# Altium PCB TSAL_Inverters.PcbDoc (part 1 of 2)
Units mm, origin at the board's own origin, x right, y up, seen from the top; angles counter-clockwise.
Board outline 68 x 46 mm, 2 copper layers (Top Layer, Bottom Layer), stack 1.57 mm thick; 50 components, 20 nets, 115 pads, 25 vias.
Unrouted connection lines stored in the file: 1.
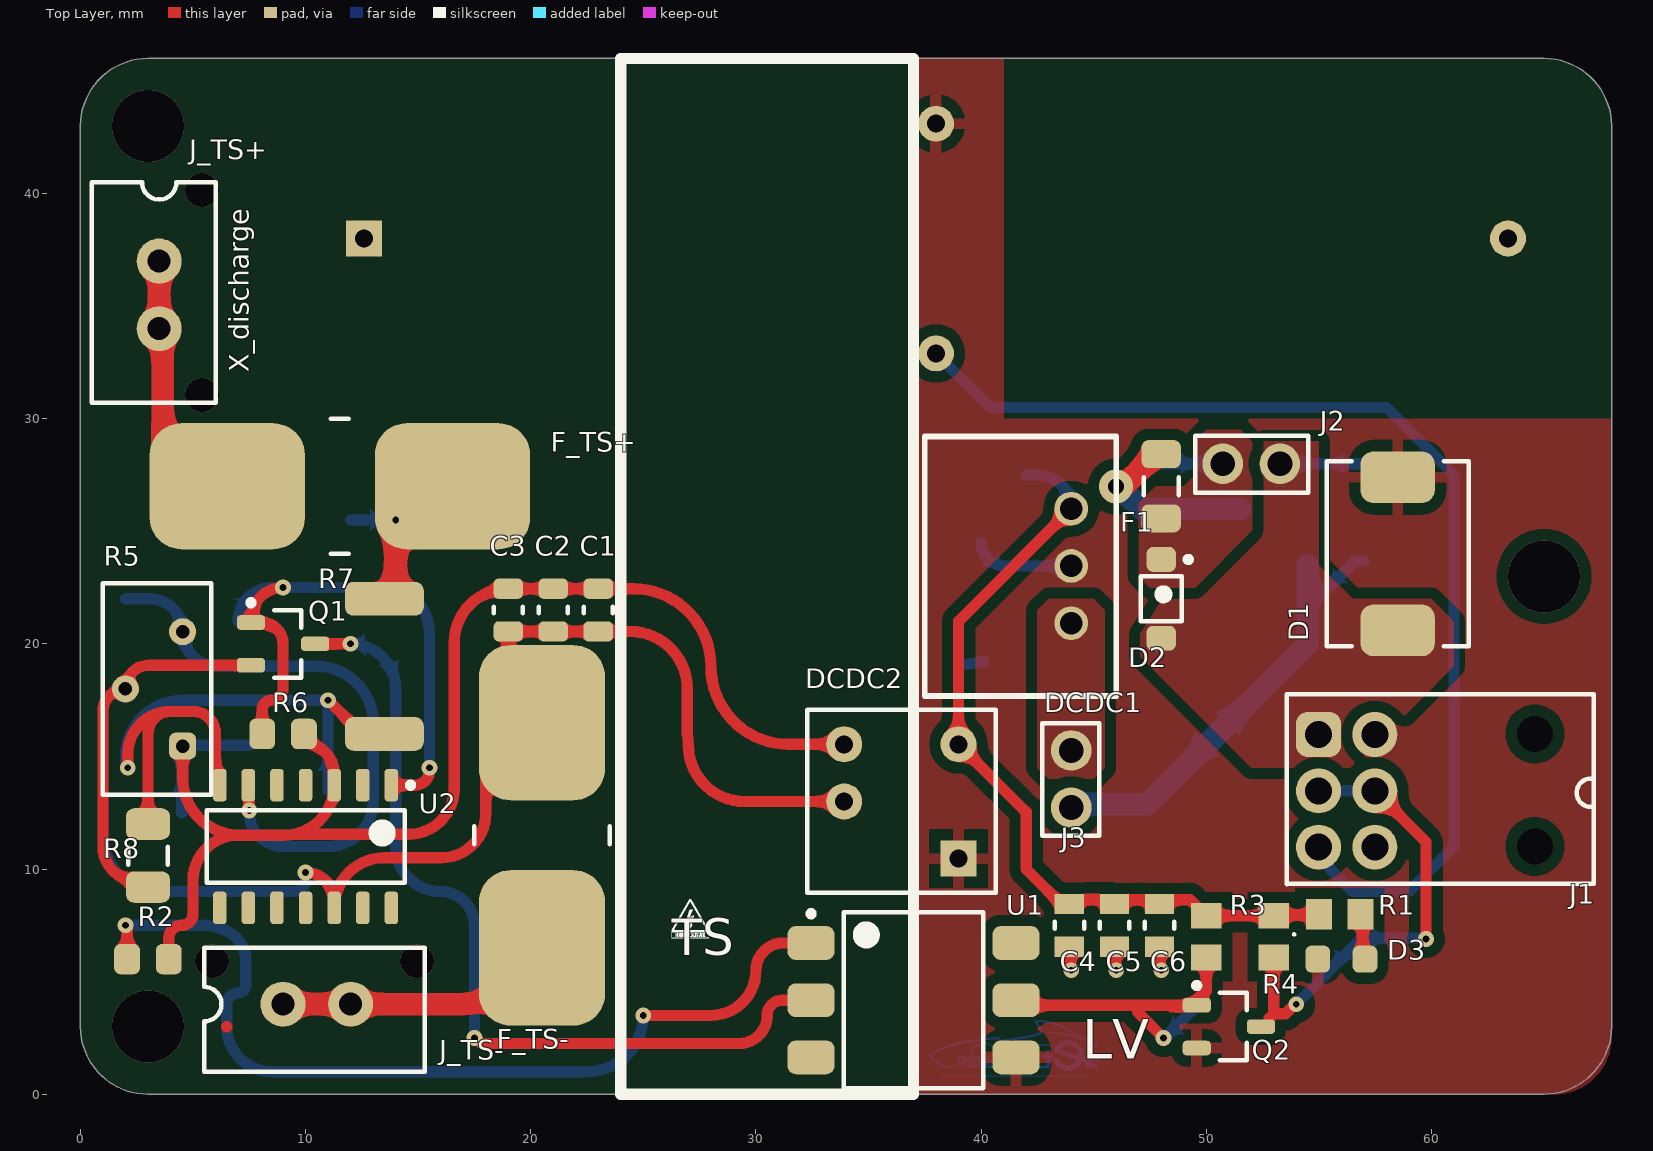
[diagram p0: Top Layer view]
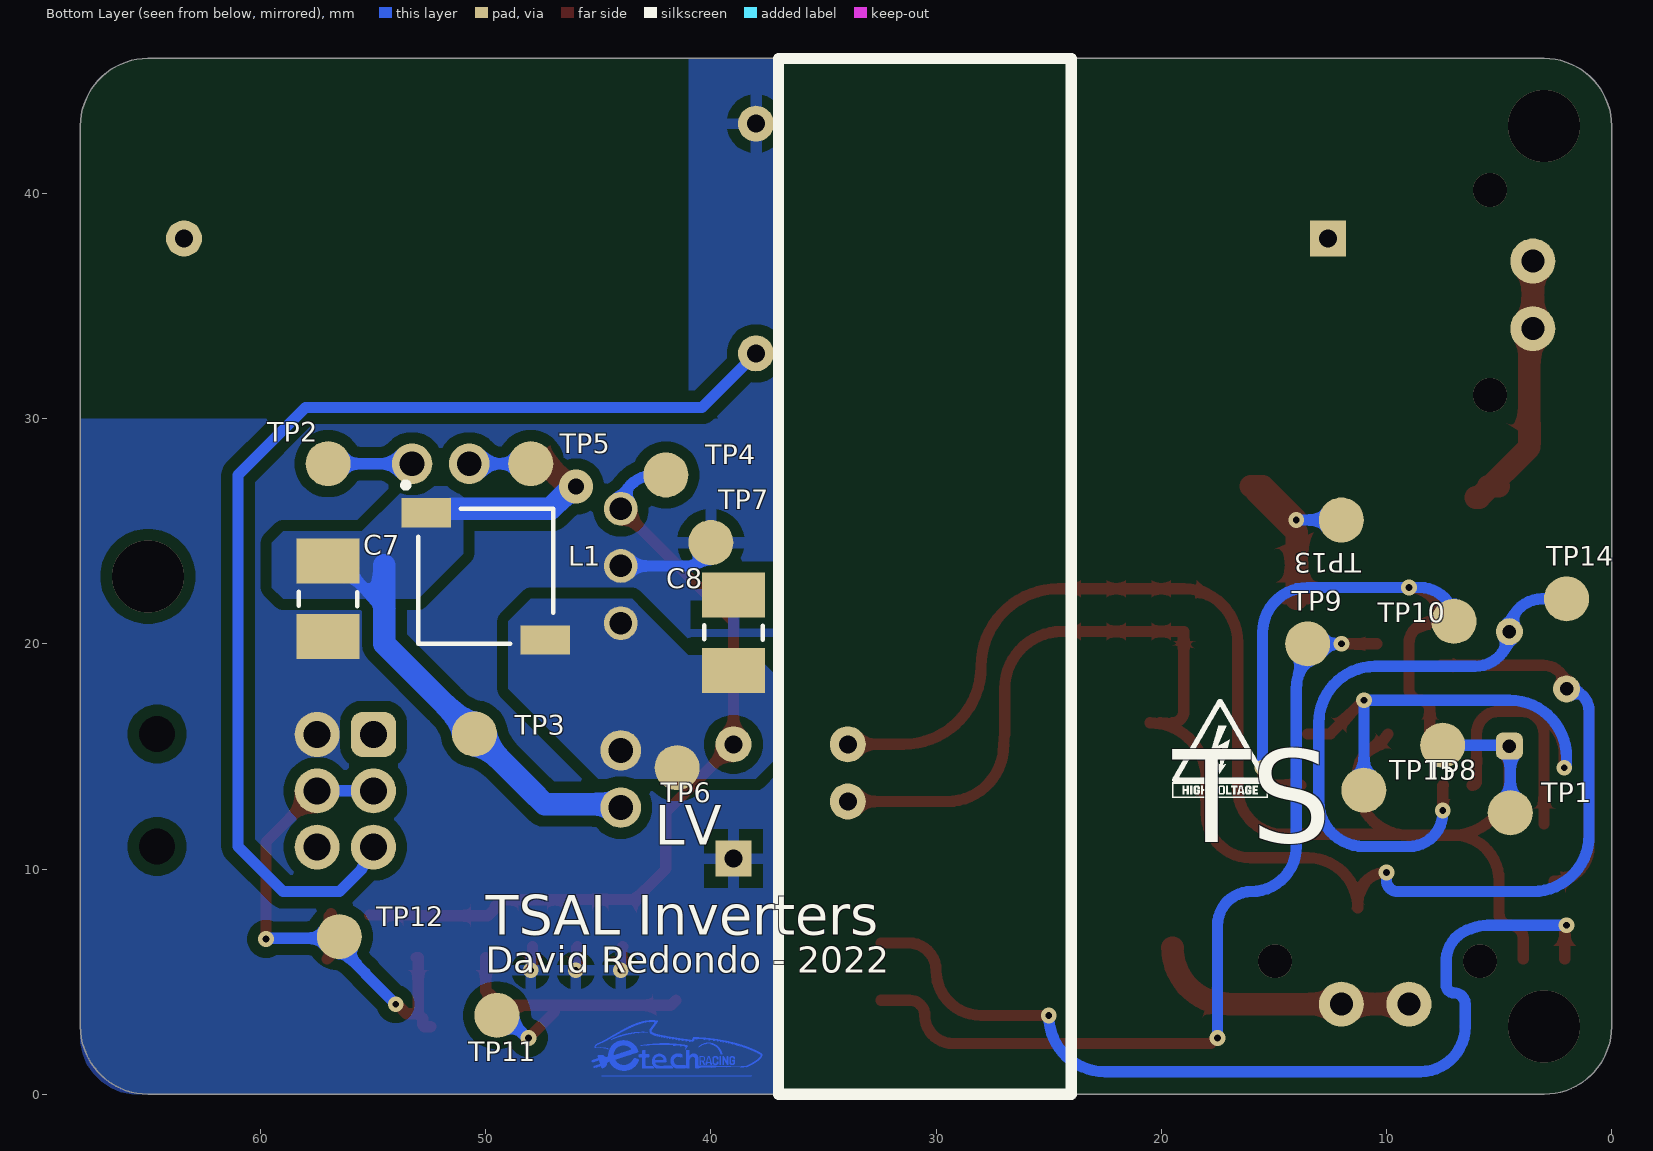
[diagram p1: Bottom Layer view, seen from below]
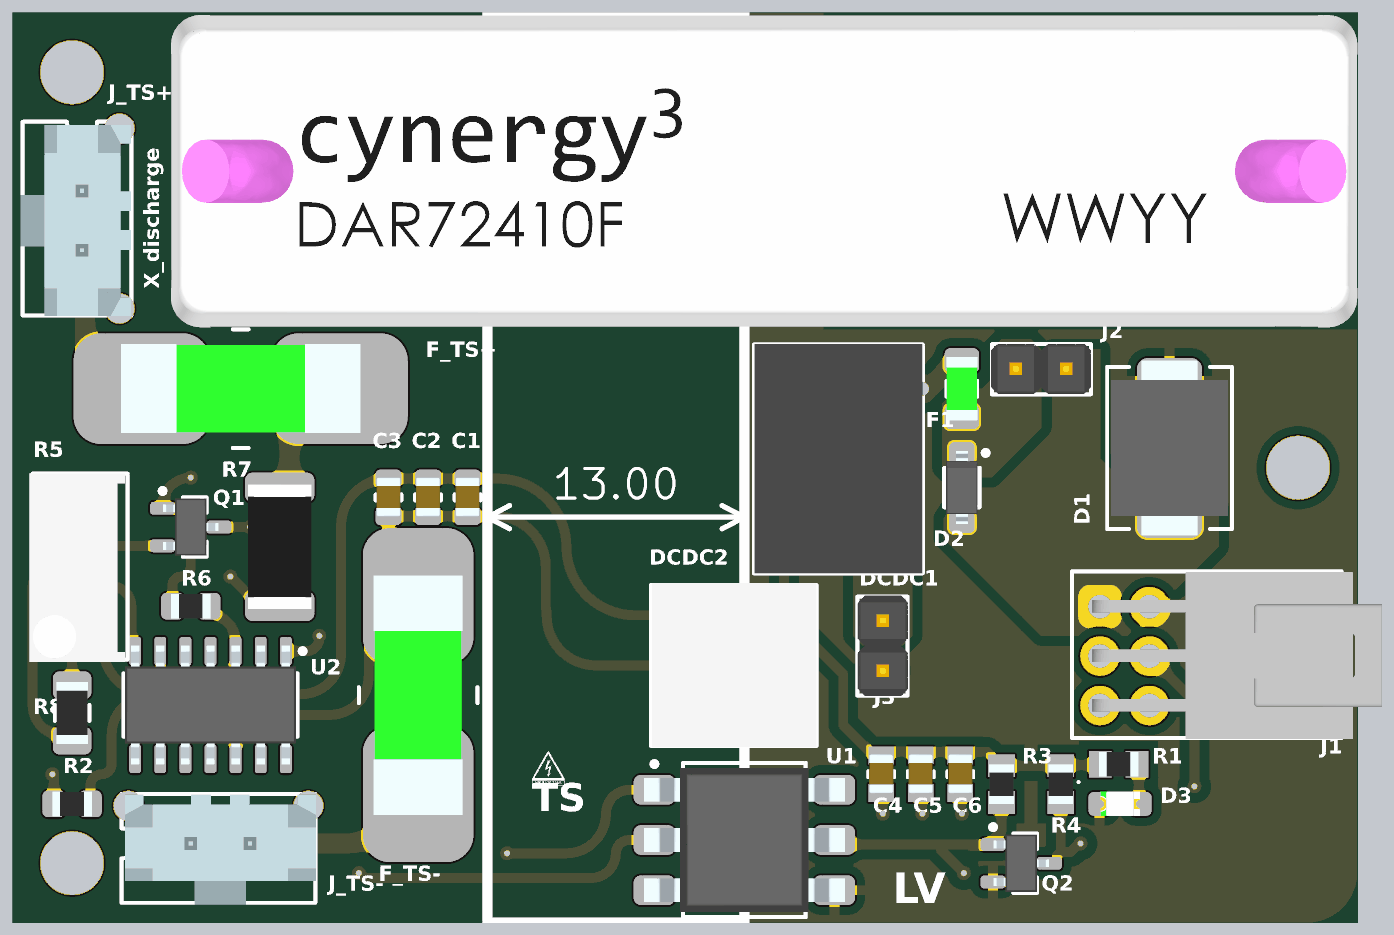
[diagram p2: 3D render of the assembled board from above, using the file's embedded part models]

## Layer stack, top to bottom
Top Solder: solder mask 0.01, Solder Resist, Dk 3.5
Top Layer: signal copper 0.035
Dielectric 1: dielectric 1.5, FR-4, Dk 4.8
Bottom Layer: signal copper 0.035
Bottom Solder: solder mask 0.01, Solder Resist, Dk 3.5

## Board outline
3,0 cw(c3,3) 0,3 0,43 cw(c3,43) 3,46 65,46 cw(c65,43) 68,43 68,3 cw(c65,3) 65,0

## Design rules (kind name [scope] priority, off if disabled: settings)
Clearance [All] p1: gap=0.5 ignorepadtopadclearanceinfootprint=FALSE
Height [All] p1: minheight=0 maxheight=40 prefheight=12.7
HoleSize [All] p1: absolutevalues=TRUE maxlimit=5 minlimit=0.2 maxpercent=80.000 minpercent=20.000
PolygonConnect [All] p1: connectstyle=Relief reliefconductorwidth=0.5 reliefentries=4 polygonreliefangle="90 Angle" airgapwidth=0.5
RoomDefinition TSAL_Inverters [InComponentClass('TSAL_Inverters')] p1: confinementstyle=ConfineIn formatcopy=TRUE lockcomponents=FALSE outline 0,0 73.5,0 73.5,47.5 0,47.5
RoutingVias [All] p1: holewidth=0.3 width=0.7 viastyle="Through Hole" minholewidth=0.2 minwidth=0.5 maxholewidth=3 maxwidth=7
SolderMaskExpansion [All] p1: expansion=0.102 istentingtop=FALSE
Width [All] p1: maxlimit=5 minlimit=0.2 preferedwidth=0.5
28 further rules are at their usual default settings.

## Components (designator, comment, footprint, x,y, rotation, side; value= is the part's Value field where it differs from the comment)
C1 "885012207092" C0805FNPC-R#1 23,21.5 r270 top
C2 "885012207098" C0805FNPC-R#1 21,21.5 r270 top
C3 "885012207103" C0805FNPC-R#1 19,21.5 r270 top
C4 "885012207092" C0805FNPC-R#2 43.92,7.5 r270 top
C5 "885012207098" C0805FNPC-R#2 45.92,7.5 r270 top
C6 "885012207103" C0805FNPC-R#2 47.92,7.5 r270 top
C7 "GRJ32ER71H106KE11L" C10u-50V-1210FNPMLCC-X7R 57,22 r90 bottom
C8 "GRJ32ER71H106KE11L" C10u-50V-1210FNPMLCC-X7R 39,20.5 r270 bottom
D1 "824551301" DTVS-DO-214AB 58.5,24 r270 top
D2 "MBR0530" DSC-SOD123 48,22 r270 top
D3 "150080VS75000" LED_0805_WE 56,6 r0 top
DCDC1 "173951236" DCDC_Magi3c 44,23.46 r270 top
DCDC2 "RNM-1205S/P" DCDC_RNM-XX05S/P 36.46,13 r270 top
F1 "0437001.WRA" Fuse_1206 48,27 r90 top
F_TS+ "485001" Fuse_485001 11.525,27 r180 top
F_TS- "485001" Fuse_485001 20.5,11.5 r270 top
J1 "J_NanoFit_2x3" J_NanoFit_2x3 61,13.5 r90 top
J2 "61300211121" J_Pinheader_1x2 52,28 r180 top
J3 "61300211121" J_Pinheader_1x2 44,14 r90 top
J_TS+ "436500215" J_MicroFit_2x1 3.5,37 r90 top
J_TS- "436500215" J_MicroFit_2x1 9,4 r180 top
L1 "CDC5D23BNP-470KC" L_47u-490mA_CF 50,23 r180 bottom
Q1 "SQ2318BES-T1_GE3" TRT-NCH-3/35-CPH 9,20 r0 top
Q2 "SQ2318BES-T1_GE3" TRT-NCH-3/35-CPH 51,3 r0 top
R1 "CR0805-JW-102ELF" R0805FTK#1 55.925,8 r180 top
R2 "CR0805-JW-102ELF" R0805FTK#2 3,6 r0 top
R3 "CR0805-JW-103ELF" R0805FTK#1 50,7 r90 top
R4 "CR0805-JW-103ELF" R0805FTK#1 53,7 r90 top
R5 "3296W-1-103LF" R10k-VTR 3.27,18 r180 top
R6 "CR0805-JW-103ELF" R0805FTK#2 9,16 r0 top
R7 "R2M-2512FTK" R2512FTK 13.5,19 r90 top
R8 "CRCW120610K0FKEA" R1206FTK-W 3,10.6 r90 top
TP1 "TestPoint" TestPoint 4.5,12.5 r180 bottom
TP2 "TestPoint" TestPoint 57,28 r180 bottom
TP3 "TestPoint" TestPoint 50.5,16 r180 bottom
TP4 "TestPoint" TestPoint 42,27.5 r180 bottom
TP5 "TestPoint" TestPoint 48,28 r180 bottom
TP6 "TestPoint" TestPoint 41.5,14.5 r180 bottom
TP7 "TestPoint" TestPoint 40,24.5 r180 bottom
TP8 "TestPoint" TestPoint 7.5,15.5 r180 bottom
TP9 "TestPoint" TestPoint 13.5,20 r180 bottom
TP10 "TestPoint" TestPoint 7,21 r90 bottom
TP11 "TestPoint" TestPoint 49.5,3.5 r270 bottom
TP12 "TestPoint" TestPoint 56.5,7 r90 bottom
TP13 "TestPoint" TestPoint 12,25.5 r270 bottom
TP14 "TestPoint" TestPoint 2,22 r90 bottom
TP15 "TestPoint" TestPoint 11,13.5 r90 bottom
U1 "4N35" Optocoupler_4N35 37,4.175 r0 top
U2 "LM339D" Array_4_Amp_LM339D 10,11 r270 top
X_discharge "DBR72410FU" Relay_DAR72410FU 38,38 r0 top

## Footprints (in the part's own frame and the unit in brackets; to place one, negate y for a bottom-side part, rotate by r counter-clockwise, add the part's x,y. Pads: shape width x height; smd on the part's side, far side on the other; paste and mask are expansions set on the pad)
Array_4_Amp_LM339D [mm] "SOIC, 14-Leads, Body 8,65x3,90mm, Pitch 1,27mm, IPC Medium Density"
  rrect50% 1.45x0.6 smd: 1(-2.725,3.81) 2(-2.725,2.54) 3(-2.725,1.27) 4(-2.725,0) 5(-2.725,-1.27) 6(-2.725,-2.54) 7(-2.725,-3.81) 8(2.725,-3.81) 9(2.725,-2.54) 10(2.725,-1.27) 11(2.725,0) 12(2.725,1.27) 13(2.725,2.54) 14(2.725,3.81)
  silkscreen extent -2.85,-4.4 1.6,4.79, body extent -3,-4.33 3,4.33, height 1.75
C10u-50V-1210FNPMLCC-X7R [mm]
  rect 2x2.8 smd: 1(-1.675,0) 2(1.675,0)
  silkscreen extent -0.33,-1.3 0.33,1.3, body extent -1.6,-1.25 1.6,1.25, height 2.78
C0805FNPC-R#1 [mm]
  rrect50% 0.9x1.3 smd: 1(-0.95,0) 2(0.95,0)
  silkscreen extent -0.15,-0.65 0.15,0.65, body extent -1.03,-0.63 0.97,0.63, height 0.96
C0805FNPC-R#2 [mm]
  rect 0.9x1.3 smd: 1(-0.95,0) 2(0.95,0)
  silkscreen extent -0.15,-0.65 0.15,0.65, body extent -1.03,-0.63 0.97,0.63, height 0.96
DCDC_Magi3c [mm]
  round 1.5 hole 1: 1(2.54,0) 2(0,0) 3(-2.54,0)
  silkscreen extent -5.75,-6.5 5.77,2, body extent -5.8,-6.5 5.8,2, height 10.2
DCDC_RNM-XX05S/P [mm]
  rect 1.6x1.6 hole 0.8: 1(2.54,2.54)
  round 1.6 hole 0.8: 3(-2.54,2.54) 4(-2.54,-2.54) 5(0,-2.54)
  silkscreen extent -4.06,-4.19 4.06,4.19, body extent -4.18,-4.12 4.12,4.18, height 6.8
DSC-SOD123 [mm] "SOIC, 2-Leads, Body 1,60x2,69mm, Pitch 1,27mm, IPC Low Density"
  rrect50% 1.1x1.3 smd: A(1.75,0) K(-1.75,0)
  silkscreen extent -1.87,-0.9 1,1.33, body extent -1.86,-0.8 1.86,0.8, height 1.36
DTVS-DO-214AB [mm] "Molded Diode, 2-Leads, Body 7,94x5,90mm"
  rrect50% 2.3x3.3 smd: 1(-3.4,0) 2(3.4,0)
  silkscreen extent -4.1,-3.15 4.1,3.15, body extent -4.42,-2.95 4.42,2.95, height 2.9
Fuse_1206 [mm] "Chip Resistor, 2-Leads, Body 3,20x1,58mm, IPC Medium Density"
  rrect50% 1.25x1.75 smd: 1(-1.425,0) 2(1.425,0)
  silkscreen extent -0.4,-0.77 0.4,0.77, body extent -1.6,-0.79 1.6,0.79, height 0.86
Fuse_485001 [mm]
  rrect50% 6.9x5.6 smd: 1(-5,0) 2(5,0)
  silkscreen extent -0.4,-3 0.4,3, body extent -6.05,-2.25 6.05,2.25, height 4.5
J_MicroFit_2x1 [mm]
  round 2 hole 1.02: 1(0,0) 2(-3,0)
  silkscreen extent -6.3,-2.5 3.5,3, body extent -6.32,-2.47 3.32,3.1, height 10
J_NanoFit_2x3 [mm]
  rrect50% 2x2 hole 1.2: 1(2.475,6.015)
  round 2 hole 1.2: 2(-0.025,6.015) 3(-2.525,6.015) 4(2.475,3.515) 5(-0.025,3.515) 6(-2.525,3.515)
  round 1.524 hole 1.6: 7(-2.5,-3.59) 7(2.5,-3.59)
  silkscreen extent -4.18,-6.2 4.26,7.42, body extent -4.22,-8.23 4.22,6.43, height 9.35
J_Pinheader_1x2 [mm]
  round 1.8 hole 1.1: 1(-1.27,0) 2(1.27,0)
  silkscreen extent -2.52,-1.25 2.48,1.29, body extent -2.54,-1.27 2.54,1.27, height 9.5
L_47u-490mA_CF [mm] "Precision Wire Wound Inductor, 2-Leads, Body 5,80x5,80mm, IPC Medium Density"
  rect 2.2x1.3 smd: 1(-2.65,2.825) 2(2.643,-2.832)
  silkscreen extent -3.68,-3 3,4.17, body extent -3,-3 3,3, height 2.5
LED_0805_WE [mm] "SODFL, 2-Leads, Body 1,60x3,20mm, IPC Medium Density"
  rrect50% 1.1x1.2 smd: A(1.05,0) K(-1.05,0)
  silkscreen extent -2.15,1.05 -2.05,1.15, body extent -1,-0.62 1,0.63, height 0.7
Optocoupler_4N35 [mm] "SOP, 6-Leads, Body 7,30x6,50mm, Pitch 2,54mm, IPC Medium Density"
  rrect50% 2.1x1.5 smd: 1(-4.55,2.54) 2(-4.55,0) 3(-4.55,-2.54) 4(4.55,-2.54) 5(4.55,0) 6(4.55,2.54)
  silkscreen extent -4.67,-3.9 3.1,3.96, body extent -5.08,-3.65 5.08,3.65, height 4.6
R10k-VTR [mm]
  rrect50% 1.2x1.2 hole 0.6: 1(-1.27,2.54)
  round 1.2 hole 0.6: 2(1.27,0) 3(-1.27,-2.54)
  silkscreen extent -2.54,-4.7 2.29,4.7, body extent -2.41,-4.71 2.43,4.82, height 11.18
R0805FTK#1 [mm] "Chip Resistor, 2-Leads, Body 2,00x1,25mm, IPC Medium Density"
  rect 1.15x1.35 smd: 1(-0.925,0) 2(0.925,0)
  body extent -1,-0.63 1,0.63, height 0.65
R0805FTK#2 [mm] "Chip Resistor, 2-Leads, Body 2,00x1,25mm, IPC Medium Density"
  rrect50% 1.15x1.35 smd: 1(-0.925,0) 2(0.925,0)
  body extent -1,-0.63 1,0.63, height 0.65
R1206FTK-W [mm] "Chip Resistor, 2-Leads, Body 3,15x1,60mm, IPC Medium Density"
  rrect50% 1.4x1.95 smd: 1(-1.4,0) 2(1.4,0)
  silkscreen extent -0.4,-0.87 0.4,0.87, body extent -1.58,-0.8 1.58,0.8, height 0.61
R2512FTK [mm]
  rrect50% 1.5x3.5 smd: 1(-3,0) 2(3,0)
  body extent -3.15,-1.6 3.15,1.6, height 0.66
Relay_DAR72410FU [mm]
  rect 1.6x1.6 hole 0.8: 1(-25.4,0)
  round 1.6 hole 0.8: 2(25.4,0) 3(0,5.1) 4(0,-5.1)
  body extent -30,-7.9 30,7.9, height 28.14
TestPoint [mm]
  round 2 smd: 1(0,0)
TRT-NCH-3/35-CPH [mm] "SOT23, 3-Leads, Body 2,90x2,80mm, Pitch 0,95mm, IPC Low Density"
  rrect50% 1.25x0.65 smd: D(1.425,0) G(-1.425,0.95) S(-1.425,-0.95)
  silkscreen extent -1.55,-1.5 0.8,1.95, body extent -1.4,-1.45 1.4,1.45, height 1.06

## Part data
C1 C4: library part C10n-50V-0805FNPC-X7R, "Cap, 0.01ΜF, 50V, 10%, X7R, 0805", Capacitance=10nF, Case Code (Imperial)=0805, Case Code (Metric)=2012, Dielectric=X7R, Manufacturer 1="Wurth Electronics", Max Operating Temperature=125°C, Min Operating Temperature=-55°C, Supplier Part Number 1=1813941, Tolerance=10%, Voltage Rating=50V, .Creator=DR, Case/Package=0805, Category="Ceramic Capacitors", ComponentLink1Description=http://www.farnell.com/datasheets/1958497.pdf?src-supplier=Farnell, ComponentLink1URL=http://www.farnell.com/datasheets/1958497.pdf?src-supplier=Farnell, ComponentLink2Description=http://www.farnell.com/datasheets/1958497.pdf?src-supplier=Element14, ComponentLink2URL=http://www.farnell.com/datasheets/1958497.pdf?src-supplier=Element14, ComponentLink3Description=http://www.farnell.com/datasheets/1958497.pdf?src-supplier=Newark, ComponentLink3URL=http://www.farnell.com/datasheets/1958497.pdf?src-supplier=Newark, ComponentLink4Description=https://katalog.we-online.de/pbs/datasheet/885012207092.pdf?src-supplier=Digi-Key, ComponentLink4URL=https://katalog.we-online.de/pbs/datasheet/885012207092.pdf?src-supplier=Digi-Key, Length=0.079inch, Manufacturer Part Number 1=885012207092, Mount="Surface Mount", Packaging="Cut Tape", Pricing 1="4000=0,03200, 12000=0,03100 (USD)", REACH SVHC=Unknown, RoHS=Yes, RoHS Compliant=Yes, Stock 1=1, Supplier 1=RSComponents, Thickness=0.035inch, Voltage Rating (DC)=50V, Width=0.049inch
C2 C5: library part C100n-50V-0805FNPC-X7R, "Cap, 0.1ΜF, 50V, 10%, X7R, 0805", Capacitance=100nF, Case Code (Imperial)=0805, Case Code (Metric)=2012, Dielectric=X7R, Manufacturer 1="Wurth Electronics", Max Operating Temperature=125°C, Min Operating Temperature=-55°C, Supplier Part Number 1=1813493, Tolerance=10%, Voltage Rating=50V, .Creator=DR, Case/Package=0805, Category="Ceramic Capacitors", ComponentLink1Description=http://www.farnell.com/datasheets/1958498.pdf?src-supplier=Farnell, ComponentLink1URL=http://www.farnell.com/datasheets/1958498.pdf?src-supplier=Farnell, ComponentLink2Description=http://www.farnell.com/datasheets/1958498.pdf?src-supplier=Element14, ComponentLink2URL=http://www.farnell.com/datasheets/1958498.pdf?src-supplier=Element14, ComponentLink3Description=https://katalog.we-online.de/pbs/datasheet/885012207098.pdf?src-supplier=Digi-Key, ComponentLink3URL=https://katalog.we-online.de/pbs/datasheet/885012207098.pdf?src-supplier=Digi-Key, ComponentLink4Description=http://www.farnell.com/datasheets/1958498.pdf?src-supplier=Newark, ComponentLink4URL=http://www.farnell.com/datasheets/1958498.pdf?src-supplier=Newark, Length=0.079inch, Manufacturer Part Number 1=885012207098, Mount="Surface Mount", Packaging="Cut Tape", Pricing 1="100=0,10200, 500=0,07100, 2000=0,06100 (GBP)", REACH SVHC=Unknown, RoHS=Yes, RoHS Compliant=Yes, Stock 1=8000, Supplier 1=RSComponents, Thickness=0.035inch, Voltage Rating (DC)=50V, Width=0.049inch
C3 C6: library part C1u-50V-0805FNPC-X7R, "Multilayer Ceramic Capacitor, Wcap-Csgp Series, 1 F, 10%, X7R, 50 V, 0805 [2012 Metric] Rohs Compliant: Yes", Capacitance=1uF, Case Code (Imperial)=0805, Case Code (Metric)=2012, Dielectric=X7R, Manufacturer 1="Wurth Electronics", Max Operating Temperature=85°C, Min Operating Temperature=-55°C, Supplier Part Number 1=1813523, Tolerance=10%, Voltage Rating=50V, .Creator=GP, Case/Package=0805, Category="Ceramic Capacitors", ComponentLink1Description=http://www.farnell.com/datasheets/1958501.pdf?src-supplier=Farnell, ComponentLink1URL=http://www.farnell.com/datasheets/1958501.pdf?src-supplier=Farnell, ComponentLink2Description=http://www.farnell.com/datasheets/1958501.pdf?src-supplier=Element14, ComponentLink2URL=http://www.farnell.com/datasheets/1958501.pdf?src-supplier=Element14, ComponentLink3Description=https://katalog.we-online.de/pbs/datasheet/885012107003.pdf?src-supplier=Digi-Key, ComponentLink3URL=https://katalog.we-online.de/pbs/datasheet/885012107003.pdf?src-supplier=Digi-Key, ComponentLink4Description=http://www.farnell.com/datasheets/1958501.pdf?src-supplier=Newark, ComponentLink4URL=http://www.farnell.com/datasheets/1958501.pdf?src-supplier=Newark, Length=0.079inch, Manufacturer Part Number 1=885012207103, Mount="Surface Mount", Packaging="Cut Tape", Pricing 1="50=0,27200, 250=0,25300, 500=0,22800, 1250=0,20100, 2500=0,17100 (GBP)", REACH SVHC=Unknown, RoHS=Yes, RoHS Compliant=Yes, Stock 1=5100, Supplier 1=RSComponents, Thickness=0.053inch, Voltage Rating (DC)=50V, Width=0.049inch
C7 C8: library part C10u-50V-1210FNPMLCC-X7R, "Multilayer Ceramic Capacitors MLCC - SMD/SMT 1210 10uF 50volts X7R +/-10% Soft Term", Capacitance=10uF, Case Code (Imperial)=1210, Case Code (Metric)=3225, Manufacturer=Murata, Max Operating Temperature=125°C, Min Operating Temperature=-55°C, Tolerance=10%, Voltage Rating=50V, .Creator=DR, Case/Package=1210, Category="Ceramic Capacitors", ComponentLink1Description=Datasheet, ComponentLink1URL=https://eu.mouser.com/datasheet/2/281/GRJ32ER71H106KE11_01-1977929.pdf, Features="Soft Termination", Length=0.126inch, Manufacturer part number=GRJ32ER71H106KE11L, Mount="Surface Mount", Packaging="Tape and Reel", Pricing 1="1000=0,33327, 2000=0,32389, 4000=0,31450, 6000=0,30511, 8000=0,29572 (USD)", RoHS=Yes, RoHS Compliant=Yes, Stock 1=19000, Supplier 1=Avnet, Supplier Part Number 1=GRJ32ER71H106KE11L, Thickness=0.11inch, Width=0.098inch
D1: library part DTVS-40V-DO-214AB, "TVS diode [Würth Elektronik] 824551301 TVS diode", Clamping Voltage=48.4V, Manufacturer="Wurth Electronics", Max Breakdown Voltage=35.05V, Max Operating Temperature=150°C, Min Operating Temperature=-65°C, Peak Pulse Current=62A, Peak Pulse Power=3kW, Power Line Protection=No, Resistor Type=Zener, Reverse Standoff Voltage=30V, Supplier Part Number 1=9217092P, .Creator=DO, Category="TVS Diodes", ComponentLink1Description=http://www.farnell.com/datasheets/2036459.pdf?src-supplier=Element14, ComponentLink1URL=http://www.farnell.com/datasheets/2036459.pdf?src-supplier=Element14, ComponentLink2Description="Where buy it", ComponentLink2URL=https://www.we-online.com/catalog/en/WE-TVSP?sq=824551301#824551301, Manufacturer part number=824551301, Min Breakdown Voltage=35.05V, Mount="Surface Mount", Number of Bidirectional Channels=1, Number of Pins=2, Packaging="Cut Tape", Polarity=Bidirectional, Pricing 1="10=1,72500, 50=1,54700, 100=1,45300, 250=1,35100, 500=1,15000 (USD)", REACH SVHC=Unknown, RoHS=Yes, RoHS Compliant=Yes, Stock 1=1, Supplier 1=RSComponents
D2: library part DSC-0.5/30-SOD123, "VR=30V IF=500mA 30pF P=410mW", Average Rectified Current=500mA, Forward Voltage=430mV, Max Forward Surge Current (Ifsm)=5.5A, Max Repetitive Reverse Voltage (Vrrm)=30V, Max Reverse Current=130uA, Package Quantity=1, Supplier Part Number 1=15R3453, .Creator=GP, Category=Diode, ComponentLink1Description=Datasheet, ComponentLink2Description="Where buy it", ComponentLink3Description=https://datasheet.ciiva.com/30479/0900766b810e2512-30479401.pdf?src-supplier=RSComponents, ComponentLink3URL=https://datasheet.ciiva.com/30479/0900766b810e2512-30479401.pdf?src-supplier=RSComponents, ComponentLink4Description=https://datasheet.ciiva.com/34301/974753-34301826.pdf?src-supplier=Jameco, ComponentLink4URL=https://datasheet.ciiva.com/34301/974753-34301826.pdf?src-supplier=Jameco, ComponentLink5Description=https://datasheet.ciiva.com/910/mbr0530-910516.pdf?src-supplier=Digi-Key, ComponentLink5URL=https://datasheet.ciiva.com/910/mbr0530-910516.pdf?src-supplier=Digi-Key, ComponentLink6Description=https://datasheet.ciiva.com/25931/mbr0530-25931989.pdf?src-supplier=Avnet+Europe, ComponentLink6URL=https://datasheet.ciiva.com/25931/mbr0530-25931989.pdf?src-supplier=Avnet+Europe, ComponentLink7Description=https://datasheet.ciiva.com/8300/mbr0530-8300905.pdf?src-supplier=Avnet, ComponentLink7URL=https://datasheet.ciiva.com/8300/mbr0530-8300905.pdf?src-supplier=Avnet, ComponentLink8Description=https://datasheet.ciiva.com/17318/mbr0530-17318568.pdf?src-supplier=Future+Electronics, ComponentLink8URL=https://datasheet.ciiva.com/17318/mbr0530-17318568.pdf?src-supplier=Future+Electronics, ComponentLink9Description=https://datasheet.ciiva.com/15144/getdatasheetpartid-86760-15144598.pdf?src-supplier=Verical, ComponentLink9URL=https://datasheet.ciiva.com/15144/getdatasheetpartid-86760-15144598.pdf?src-supplier=Verical, ComponentLink10Description=https://datasheet.ciiva.com/910/mbr0530-910518.pdf?src-supplier=Digi-Key, ComponentLink10URL=https://datasheet.ciiva.com/910/mbr0530-910518.pdf?src-supplier=Digi-Key, Contact Plating=Tin,Matte, Current Rating=500mA, Element Configuration=Single, Forward Current=500mA, Height=1.03mm, Lead Free="Lead Free", Length=2.7mm, Max Reverse Leakage Current=130uA, Max Reverse Voltage (DC)=30V, Max Surge Current=5.5A, Mount="Surface Mount", Output Current=500mA, Peak Non-Repetitive Surge Current=5.5A, Polarity=Standard, Pricing 1="1=0,34400, 10=0,23900, 100=0,12200, 500=0,10000 (USD)", Radiation Hardening=No, REACH SVHC="No SVHC", RoHS Compliant=Yes, Series=-, Stock 1=9, Supplier 1=Newark, Voltage Rating (DC)=30V, Weight=0.03g, Width=1.6mm
D3: library part LEDVS-0805-40, "Led, Green, 570 Nm, 2 V, 30 Ma, 40 Mcd Rohs Compliant: Yes", Case Code (Imperial)=0805, Case Code (Metric)=2012, Color=Green, Forward Current=30mA, Forward Voltage=2V, Manufacturer 1="Wurth Electronics", Max Operating Temperature=85°C, Min Operating Temperature=-40°C, Package Quantity=4000, Supplier Part Number 1=8154237, Test Current=20mA, .Creator=DR, Case/Package=0805, Category=LEDs, ComponentLink1Description=Datasheet, ComponentLink1URL=https://www.we-online.com/catalog/datasheet/150080VS75000.pdf, ComponentLink2Description="Where buy it", ComponentLink2URL=https://katalog.we-online.de/en/led/WL-SMCW/150080VS75000, ComponentLink3Description=https://datasheet.ciiva.com/22656/150080vs75000-22656966.pdf?src-supplier=Element14, ComponentLink3URL=https://datasheet.ciiva.com/22656/150080vs75000-22656966.pdf?src-supplier=Element14, ComponentLink4Description=https://datasheet.ciiva.com/29279/759437-da-01-en-chipled-0805-w-kl-h-gruen-150080vs7500-29279047.pdf?src-supplier=Conrad, ComponentLink4URL=https://datasheet.ciiva.com/29279/759437-da-01-en-chipled-0805-w-kl-h-gruen-150080vs7500-29279047.pdf?src-supplier=Conrad, ComponentLink5Description=https://datasheet.ciiva.com/29563/150080vs75000-29563018.pdf?src-supplier=Digi-Key, ComponentLink5URL=https://datasheet.ciiva.com/29563/150080vs75000-29563018.pdf?src-supplier=Digi-Key, Dominant Wavelength=570nm, Height=0.7mm, Length=2mm, Lens Style=Clear,Rectangular, Luminous Intensity=40mcd, Manufacturer Part Number 1=150080VS75000, Mount="Surface Mount", Packaging="Tape and Reel", Pricing 1="50=0,19300, 500=0,12900, 1000=0,12300, 2000=0,11700, 4000=0,11100 (USD)", REACH SVHC=Unknown, RoHS=Yes, Stock 1=850, Supplier 1=RSComponents, Viewing Angle=140°, Wavelength=570nm, Width=1.25mm
DCDC1: library part DCDC-36V/12V-0.5A, "Fdsm Fixed Step Down Regulator M", Manufacturer 1="Wurth Electronics", Supplier Part Number 1=732-173951236-ND, Category="Board Mount Modules", ComponentLink1Description=Datasheet, ComponentLink1URL=https://www.we-online.com/catalog/datasheet/173951236.pdf, Manufacturer Part Number 1=173951236, Pricing 1="1=3,29000, 10=2,99100, 20=2,81300, 30=2,63600, 43=2,39907 (USD)", RoHS=No, Stock 1=32, Supplier 1=Digi-Key
DCDC2: library part DCDC_RNM-1205S/P, "1W DC/DC-Converter 'ECONOLINE' DIP6 1kV unreg; V. In: 12; V. Out: 05; mA. Out: 200", Case/Package=DIP, Isolation Voltage=1kV, Manufacturer 1=Recom, Max Input Voltage=13.2V, Max Operating Temperature=85°C, Max Output Current=200mA, Max Output Voltage=5V, Max power dissipation=1W, Min Input Voltage=10.8V, Min Operating Temperature=-40°C, Nominal Input Voltage=12V, Package Quantity=60, Supplier Part Number 1=919-RNM-1205S/P, Category="Voltage Regulators - Switching", ComponentLink1Description=https://datasheet.ciiva.com/2172/rnm-2172495.pdf?src-supplier=Digi-Key, ComponentLink1URL=https://datasheet.ciiva.com/2172/rnm-2172495.pdf?src-supplier=Digi-Key, Efficiency=78%, Features=SCP, Height=6.8mm, Lead Free="Lead Free", Length=8.3mm, Manufacturer Part Number 1=RNM-1205S/P, Mount="Through Hole", Number of Outputs=1, Output Power=1W, Packaging=Rail/Tube, Pricing 1="1=8,32000, 10=8,08000, 50=7,84000, 100=7,60000, 1000=6,65000, 10000=6,42000 (USD)", RoHS=Yes, RoHS Compliant=Yes, Series="ECONOLINE RNM", Stock 1=40, Supplier 1=Mouser, Voltage - Output 1=5V, Weight=1.1g, Width=8.3mm
F1: library part Fuse_1A_63V_1206, "Fuse Chip Fast Acting 1A 63V SMD Solder Pad 1206 Ceramic T/R Automotive", Case Code (Imperial)=1206, Case Code (Metric)=3216, Current Rating=1A, Manufacturer=Littelfuse, Max Operating Temperature=150°C, Min Operating Temperature=-55°C, Supplier Part Number 1=F10001CT-ND, Voltage Rating (AC)=63V, .Creator=DO, Approvals=CSA,cURus, Case/Package=1206, Category=Fuses, ComponentLink1Description=https://www.littelfuse.com/~/media/electronics/datasheets/fuses/littelfuse_fuse_437a_datasheet.pdf.pdf?src-supplier=Digi-Key, ComponentLink1URL=https://www.littelfuse.com/~/media/electronics/datasheets/fuses/littelfuse_fuse_437a_datasheet.pdf.pdf?src-supplier=Digi-Key, ComponentLink2Description="Where buy it", ComponentLink2URL=https://www.mouser.es/ProductDetail/Littelfuse/0437001WRA?qs=DXv0QSHKF4z9CJhPXjxR%252BA%3D%3D, Fuse Type="Board Mount (Cartridge Style Excluded)", Manufacturer part number=0437001.WRA, Mount="Surface Mount", Packaging="Tape and Reel", Pricing 1="1=1,52000, 5=1,47000, 10=1,37600, 50=1,13860, 100=0,94880, 250=0,92508, 500=0,78276, 1000=0,68788 (USD)", RoHS=Yes, Stock 1=5820, Supplier 1=Digi-Key, Voltage Rating (DC)=63V
F_TS+ F_TS-: library part Fuse_1A_600V, "Surface Mount Fuses 600V 1A Fast Acting", Case/Package=SMD/SMT, Current Rating=1A, DC Cold Resistance=304.4mR, Manufacturer 1=Littelfuse, Manufacturer Part Number 1=0485001.DR, Max Operating Temperature=125°C, Min Operating Temperature=-55°C, Package Quantity=1, Resistance=264mR, Voltage Rating=600V, Voltage Rating (AC)=250V, .Creator=DO, Approvals=UL,CSA, Body Material=Ceramic, Category=Fuses, ComponentLink1Description=http://www.farnell.com/datasheets/1945989.pdf?src-supplier=Farnell, ComponentLink1URL=http://www.farnell.com/datasheets/1945989.pdf?src-supplier=Farnell, ComponentLink2Description=http://www.farnell.com/datasheets/2282568.pdf?src-supplier=Farnell, ComponentLink2URL=http://www.farnell.com/datasheets/2282568.pdf?src-supplier=Farnell, ComponentLink3Description=http://www.mouser.com/ds/2/240/Littelfuse485_datasheet_080512-201879.pdf?src-supplier=Mouser, ComponentLink3URL=http://www.mouser.com/ds/2/240/Littelfuse485_datasheet_080512-201879.pdf?src-supplier=Mouser, ComponentLink4Description=http://components.arrow.com/part/dataview/56707787S790276N3675?src-supplier=Arrow+Electronics, ComponentLink4URL=http://components.arrow.com/part/dataview/56707787S790276N3675?src-supplier=Arrow+Electronics, ComponentLink5Description=http://www.littelfuse.com/~/media/Files/Littelfuse/Technical%20Resources/Documents/Data%20Sheets/Littelfuse_Fuse_485_Datasheet.pdf?src-supplier=Element14, ComponentLink5URL=http://www.littelfuse.com/~/media/Files/Littelfuse/Technical%20Resources/Documents/Data%20Sheets/Littelfuse_Fuse_485_Datasheet.pdf?src-supplier=Element14, ComponentLink6Description=http://www.littelfuse.com/~/media/electronics/datasheets/fuses/littelfuse_fuse_485_datasheet.pdf.pdf?src-supplier=Digi-Key, ComponentLink6URL=http://www.littelfuse.com/~/media/electronics/datasheets/fuses/littelfuse_fuse_485_datasheet.pdf.pdf?src-supplier=Digi-Key, Depth=4.5mm, Fuse Current=1A, Fuse Type="Board Mount (Cartridge Style Excluded)", Height=0.177inch, Housing Material=Ceramic, Lead Free="Lead Free", Length=12.1mm, Mount="Surface Mount", Packaging="Tape and Reel", Pricing 1="1=2,82900, 5=2,81400, 10=2,75200, 50=2,59800, 100=2,40300, 250=2,37900, 500=2,30400, 1500=2,24900, 3000=2,11600 (USD)", REACH SVHC="No SVHC", RoHS=Yes, RoHS Compliant=Yes, Series=485, Stock 1=4123, Supplier 1="Arrow Electronics", Supplier Part Number 1=0485001.DR, Termination=SMD/SMT, Voltage Rating (DC)=600V, Width=0.177inch
J2 J3: library part J_Jumper, "CONN HEADER 2 POS 2.54", Color=Black, Current Rating=3A, Manufacturer=Molex, Max Operating Temperature=125°C, Maximum current="3 A", Maximum voltage="250 V AC", Min Operating Temperature=-40°C, Supplier Part Number 1=8281581, Temperature rating="-40° to +105°C", Voltage Rating=250V, .Creator=GP, Application=Shortcircuit, Category=Connector, Category type=PCB-PCB, ComponentLink1Description=Datasheet, ComponentLink1URL=https://www.we-online.com/catalog/datasheet/61300211121.pdf, ComponentLink2Description="Where buy it", ComponentLink2URL=https://www.we-online.com/catalog/en/PHD_2_54_THT_PIN_HEADER_6130XX11121?sq=61300211121&sp=https%3A%2F%2Fwww.we-online.com%2Fweb%2Fen%2Fwuerth_elektronik%2Fsearchpage.php%3Fsearch%3D61300211121#61300211121, ComponentLink3Description=https://datasheet.ciiva.com/13619/6130xx11121-48870-13619345.pdf?src-supplier=Mouser, ComponentLink3URL=https://datasheet.ciiva.com/13619/6130xx11121-48870-13619345.pdf?src-supplier=Mouser, Connections=1x2, Connector Type="Male Pin", Contact Gender=Male, Contact Material="Copper Alloy,Copper", Contact Mating Length=0.236inch, Contact Plating=Gold, Flammability=94V-0, Gender=Male, Housing Material=PBT, Lead Free="Lead Free", Manufacturer part number=61300211121, Mount="Through hole", Number of Contacts=2, Number of Positions=2, Number of Rows=1, Orientation=Vertical, Packaging=Bulk, Pitch=0.1inch, Pricing 1="5=0,14100, 50=0,09700, 100=0,07800, 200=0,07300, 500=0,06800 (USD)", Product name="Pin Header", REACH SVHC=Unknown, Stock 1=1855, Supplier="Würth Elektronik", Supplier 1=RSComponents, Termination="Through Hole"
J_TS+ J_TS-: library part J_MicroFit_2x1, "Header 1 Row Vertical Polarizing Peg 2 Pin SMT/Glow Wire Compatible Tin Plate", Manufacturer 1=Molex, Manufacturer Part Number 1=43650-0215, Category="Headers and Wire Housings", ComponentLink1Description=https://datasheet.ciiva.com/19462/884109-19462034.pdf?src-supplier=Jameco, ComponentLink1URL=https://datasheet.ciiva.com/19462/884109-19462034.pdf?src-supplier=Jameco, ComponentLink2Description=https://datasheet.ciiva.com/5157/0436500215-pcb-headers-148687-5157608.pdf?src-supplier=Mouser, ComponentLink2URL=https://datasheet.ciiva.com/5157/0436500215-pcb-headers-148687-5157608.pdf?src-supplier=Mouser, ComponentLink3Description=https://datasheet.ciiva.com/16085/0436500215-pcb-headers-16085668.pdf?src-supplier=Onlinecomponents.com, ComponentLink3URL=https://datasheet.ciiva.com/16085/0436500215-pcb-headers-16085668.pdf?src-supplier=Onlinecomponents.com, ComponentLink4Description=https://datasheet.ciiva.com/11748/0900766b80307ce2-11748388.pdf?src-supplier=RSComponents, ComponentLink4URL=https://datasheet.ciiva.com/11748/0900766b80307ce2-11748388.pdf?src-supplier=RSComponents, ComponentLink5Description=https://datasheet.ciiva.com/9432/0436500215-pcb-headers-9432850.pdf?src-supplier=Avnet, ComponentLink5URL=https://datasheet.ciiva.com/9432/0436500215-pcb-headers-9432850.pdf?src-supplier=Avnet, ComponentLink6Description=https://datasheet.ciiva.com/7920/1889390-7920892.pdf?src-supplier=Element14, ComponentLink6URL=https://datasheet.ciiva.com/7920/1889390-7920892.pdf?src-supplier=Element14, Pricing 1="1=0,87800, 10=0,74400, 80=0,63070, 3264=0,47000, 6528=0,45100, 13056=0,41760 (USD)", RoHS=Yes, Stock 1=11086, Supplier 1="Arrow Electronics", Supplier Part Number 1=43650-0215
L1: library part L_47u-490mA_CF, "Inductor Power Unshielded Wirewound 47uH 10% 100KHz Ferrite 490mA 546mOhm DCR T/R", Case/Package=Nonstandard, Current Rating=490mA, DC Resistance (DCR)=546mR, Inductance=47uH, Manufacturer=Sumida, Max Operating Temperature=100°C, Min Operating Temperature=-40°C, Package Quantity=2000, Supplier Part Number 1=851-CDC5D23BNP-470KC, Test Frequency=100kHz, Tolerance=10%, .Creator=GP, Category="Fixed Inductors", ComponentLink1Description=http://www.mouser.com/ds/2/390/CDC5D23B-465898.pdf?src-supplier=Mouser, ComponentLink1URL=http://www.mouser.com/ds/2/390/CDC5D23B-465898.pdf?src-supplier=Mouser, ComponentLink3Description=http://products.sumida.com/products/pdf/CDC5D23B.pdf?src-supplier=Digi-Key, ComponentLink3URL=http://products.sumida.com/products/pdf/CDC5D23B.pdf?src-supplier=Digi-Key, Core Material=Ferrite, Height=2.5mm, Height - Seated (Max)=0.098inch, Lead Free="Lead Free", Length=0.228inch, Manufacturer part number=CDC5D23BNP-470KC, Max DC Current=490mA, Mount="Surface Mount", Packaging="Tape and Reel", Pricing 1="1=0,95000, 10=0,71100, 50=0,71100, 100=0,59700, 1000=0,40600, 10000=0,38100 (USD)", RoHS=Yes, RoHS Compliant=Yes, Series=CDC5D23B, Shielding=Unshielded, Stock 1=3779, Supplier 1=Mouser, Termination=SMD/SMT, Weight=0.007584oz, Width=5.8mm
Q1 Q2: library part TRT-NCH-8/40-SQ, "Automotive N-channel 40 V (d-s) 175C Mosfet SOT-23", Manufacturer 1=Vishay, Supplier Part Number 1=81AH9290, .Creator=DO, ComponentLink1Description="Where to buy", ComponentLink1URL=https://www.mouser.es/ProductDetail/Vishay-Siliconix/SQ2318BES-T1_GE3?qs=sPbYRqrBIVmyZcxPsDt0vA%3D%3D, ComponentLink2Description=Datasheet, ComponentLink2URL=https://www.mouser.es/datasheet/2/427/sq2318bes-1868475.pdf, Id=8A, Manufacturer Part Number 1=SQ2318BES-T1_GE3, Pricing 1="1=0,71500, 5=0,71500, 10=0,64400, 25=0,59000, 50=0,52500, 100=0,47100, 250=0,40800 (USD)", RoHS=No, Supplier 1=Newark, Vds=40V
R1 R2: library part R1k-0805FTK, "Res Thick Film 0805 1K Ohm 5% 1/8W ±200ppm/°C Molded SMD SMD Paper Tape on Plastic Reel", Case Code (Imperial)=0805, Case Code (Metric)=2012, Manufacturer 1=Bourns, Max Operating Temperature=155°C, Max power dissipation=125mW, Min Operating Temperature=-55°C, Package Quantity=1, Resistance=1kR, Resistor Type="Thick Film", Temperature Coefficient=200ppm/°C, Tolerance=5%, Voltage Rating=150V, .Creator=GP, Case/Package=0805, Category="Chip SMD Resistors", ComponentLink1Description=https://datasheet.ciiva.com/11821/0900766b80fcdb72-11821134.pdf?src-supplier=RSComponents, ComponentLink1URL=https://datasheet.ciiva.com/11821/0900766b80fcdb72-11821134.pdf?src-supplier=RSComponents, ComponentLink2Description=https://datasheet.ciiva.com/15225/getdatasheetpartid-78155-15225381.pdf?src-supplier=Verical, ComponentLink2URL=https://datasheet.ciiva.com/15225/getdatasheetpartid-78155-15225381.pdf?src-supplier=Verical, ComponentLink3Description=https://datasheet.ciiva.com/22693/1902866-22693253.pdf?src-supplier=Element14, ComponentLink3URL=https://datasheet.ciiva.com/22693/1902866-22693253.pdf?src-supplier=Element14, ComponentLink4Description=https://datasheet.ciiva.com/7986/1856384-7986184.pdf?src-supplier=Element14, ComponentLink4URL=https://datasheet.ciiva.com/7986/1856384-7986184.pdf?src-supplier=Element14, ComponentLink5Description=https://datasheet.ciiva.com/7985/1856384-7985867.pdf?src-supplier=Element14, ComponentLink5URL=https://datasheet.ciiva.com/7985/1856384-7985867.pdf?src-supplier=Element14, ComponentLink6Description=https://datasheet.ciiva.com/30242/159chpreztr-30242765.pdf?src-supplier=Onlinecomponents.com, ComponentLink6URL=https://datasheet.ciiva.com/30242/159chpreztr-30242765.pdf?src-supplier=Onlinecomponents.com, ComponentLink7Description=https://datasheet.ciiva.com/6547/chpreztr-6547359.pdf?src-supplier=Digi-Key, ComponentLink7URL=https://datasheet.ciiva.com/6547/chpreztr-6547359.pdf?src-supplier=Digi-Key, Contact Plating=Tin, Depth=1.25mm, Features="Moisture Resistant", Height=0.5mm, Lead Free="Lead Free", Length=2mm, Manufacturer Part Number 1=CR0805-JW-102ELF, Military Standard=Not, Mount="Surface Mount", Number of Pins=2, Number of Terminations=2, Packaging="Tape and Reel", Power rating=125mW, Pricing 1="1=0,05930, 10=0,03510, 25=0,01790, 100=0,00800, 250=0,00790, 500=0,00590, 1000=0,00360, 3000=0,00350, 6000=0,00250 (USD)", Radiation Hardening=No, REACH SVHC="No SVHC", RoHS=Yes, Stock 1=27510, Supplier 1="Arrow Electronics", Supplier Part Number 1=CR0805-JW-102ELF, Termination=SMD/SMT, Thickness=508um, Voltage Rating (DC)=150V, Width=1.25mm
R3 R4 R6: library part R10k-0805FTK, "BOURNS         CR0805-JW-103ELF            Surface Mount Chip Resistor, Thick Film, CR Series, 10 kohm, 125 mW,  5%, 150 V", Case Code (Imperial)=0805, Case Code (Metric)=2012, Manufacturer 1=Bourns, Max Operating Temperature=155°C, Max power dissipation=125mW, Min Operating Temperature=-55°C, Package Quantity=1, Resistance=10kR, Resistance Tolerance=5%, Resistor Type="Thick Film", Temperature Coefficient=200ppm/°C, Voltage Rating=150V, Voltage Rating (DC)=100V, .Creator=DR, Case/Package=0805, Category="Chip SMD Resistors", ComponentLink1Description=https://datasheet.ciiva.com/11821/0900766b80fcdb72-11821135.pdf?src-supplier=RSComponents, ComponentLink1URL=https://datasheet.ciiva.com/11821/0900766b80fcdb72-11821135.pdf?src-supplier=RSComponents, ComponentLink2Description=https://datasheet.ciiva.com/9122/chpreztr-9122374.pdf?src-supplier=Avnet, ComponentLink2URL=https://datasheet.ciiva.com/9122/chpreztr-9122374.pdf?src-supplier=Avnet, ComponentLink3Description=https://datasheet.ciiva.com/22693/1902866-22693254.pdf?src-supplier=Element14, ComponentLink3URL=https://datasheet.ciiva.com/22693/1902866-22693254.pdf?src-supplier=Element14, ComponentLink4Description=https://datasheet.ciiva.com/7986/691949-7986187.pdf?src-supplier=Element14, ComponentLink4URL=https://datasheet.ciiva.com/7986/691949-7986187.pdf?src-supplier=Element14, ComponentLink5Description=https://datasheet.ciiva.com/30065/159chpreztr-30065976.pdf?src-supplier=Onlinecomponents.com, ComponentLink5URL=https://datasheet.ciiva.com/30065/159chpreztr-30065976.pdf?src-supplier=Onlinecomponents.com, ComponentLink6Description=https://datasheet.ciiva.com/16783/70154685-16783482.pdf?src-supplier=Allied+Electronics, ComponentLink6URL=https://datasheet.ciiva.com/16783/70154685-16783482.pdf?src-supplier=Allied+Electronics, ComponentLink7Description=https://datasheet.ciiva.com/5548/chpreztr-5548491.pdf?src-supplier=Mouser, ComponentLink7URL=https://datasheet.ciiva.com/5548/chpreztr-5548491.pdf?src-supplier=Mouser, ComponentLink8Description=https://datasheet.ciiva.com/6559/chpreztr-6559900.pdf?src-supplier=Digi-Key, ComponentLink8URL=https://datasheet.ciiva.com/6559/chpreztr-6559900.pdf?src-supplier=Digi-Key, ComponentLink9Description=https://datasheet.ciiva.com/6559/chpreztr-6559901.pdf?src-supplier=Digi-Key, ComponentLink9URL=https://datasheet.ciiva.com/6559/chpreztr-6559901.pdf?src-supplier=Digi-Key, ComponentLink10Description=https://datasheet.ciiva.com/7985/1856384-7985869.pdf?src-supplier=Element14, ComponentLink10URL=https://datasheet.ciiva.com/7985/1856384-7985869.pdf?src-supplier=Element14, ComponentLink11Description=https://datasheet.ciiva.com/48692/001055517-da-01-en-smd-wid-cr0805-jw-103elf-10k-ohm-1-8w-48692118.pdf?src-supplier=Conrad, ComponentLink11URL=https://datasheet.ciiva.com/48692/001055517-da-01-en-smd-wid-cr0805-jw-103elf-10k-ohm-1-8w-48692118.pdf?src-supplier=Conrad, Construction=Rectangular, Contact Plating=Tin, Depth=1.25mm, Features="Moisture Resistant", Height=0.5mm, Length=2mm, Manufacturer Part Number 1=CR0805-JW-103ELF, Military Standard=Not, Mount="Surface Mount", Number of Pins=2, Number of Terminations=2, Packaging="Tape and Reel", Power rating=125mW, Pricing 1="1=0,05790, 10=0,01540, 25=0,01340, 100=0,00340 (USD)", Radiation Hardening=No, REACH SVHC="No SVHC", RoHS=Yes, RoHS Compliant=Yes, Series=CR0805, Stock 1=57566, Supplier 1="Arrow Electronics", Supplier Part Number 1=CR0805-JW-103ELF, Technology="THICK FILM", Termination=SMD/SMT, Thickness=508um, Tolerance=5%, Width=1.25mm
R5: library part R10k-VTR, "Trimmer, Cermet, Rest 10 Kilohms, PCB, 25 Turns, Pwr-Rtg 0.5W, 3296 Series", Color=Blue, Insulation Resistance=1GR, Manufacturer=Bourns, Max Operating Temperature=125°C, Max power dissipation=500mW, Min Operating Temperature=-55°C, Package Quantity=50, Resistance=10kR, Resistance Tolerance=10%, Resistor Type=Cermet, Supplier Part Number 1=1673377, Temperature Coefficient=100ppm/°C, .Creator=DO, Category="Variable Resistors and Potentiometers", ComponentLink1Description=https://datasheet.ciiva.com/19454/853572-19454866.pdf?src-supplier=Jameco, ComponentLink1URL=https://datasheet.ciiva.com/19454/853572-19454866.pdf?src-supplier=Jameco, ComponentLink2Description=https://datasheet.ciiva.com/11830/0900766b8069ccf4-11830871.pdf?src-supplier=RSComponents, ComponentLink2URL=https://datasheet.ciiva.com/11830/0900766b8069ccf4-11830871.pdf?src-supplier=RSComponents, ComponentLink3Description=https://datasheet.ciiva.com/29122/447277-da-01-en-trimmer-tht3296w-1-103lf-10k-0-5w-29122362.pdf?src-supplier=Conrad, ComponentLink3URL=https://datasheet.ciiva.com/29122/447277-da-01-en-trimmer-tht3296w-1-103lf-10k-0-5w-29122362.pdf?src-supplier=Conrad, ComponentLink4Description=https://datasheet.ciiva.com/26913/3296w-1-103lf-26913885.pdf?src-supplier=IIIC, ComponentLink4URL=https://datasheet.ciiva.com/26913/3296w-1-103lf-26913885.pdf?src-supplier=IIIC, ComponentLink5Description=https://datasheet.ciiva.com/1131/1815117-1131273.pdf?src-supplier=Element14, ComponentLink5URL=https://datasheet.ciiva.com/1131/1815117-1131273.pdf?src-supplier=Element14, ComponentLink6Description=https://datasheet.ciiva.com/18411/70153578-18411561.pdf?src-supplier=Allied+Electronics, ComponentLink6URL=https://datasheet.ciiva.com/18411/70153578-18411561.pdf?src-supplier=Allied+Electronics, ComponentLink7Description=https://datasheet.ciiva.com/3266/3296-3266187.pdf?src-supplier=Avnet, ComponentLink7URL=https://datasheet.ciiva.com/3266/3296-3266187.pdf?src-supplier=Avnet, ComponentLink8Description=https://datasheet.ciiva.com/30093/3296-30093899.pdf?src-supplier=Onlinecomponents.com, ComponentLink8URL=https://datasheet.ciiva.com/30093/3296-30093899.pdf?src-supplier=Onlinecomponents.com, ComponentLink9Description=https://datasheet.ciiva.com/2156/3296-2156893.pdf?src-supplier=Digi-Key, ComponentLink9URL=https://datasheet.ciiva.com/2156/3296-2156893.pdf?src-supplier=Digi-Key, ComponentLink10Description=https://datasheet.ciiva.com/14173/ew3296-dat-e-14173022.pdf?src-supplier=Distrelec, ComponentLink10URL=https://datasheet.ciiva.com/14173/ew3296-dat-e-14173022.pdf?src-supplier=Distrelec, ComponentLink11Description="Where buy it", ComponentLink11URL=https://es.rs-online.com/web/p/potenciometros-de-ajuste/5219647, Contact Plating=Tin,Matte, Depth=4.83mm, Height=0.395inch, Lead Free="Lead Free", Length=9.53mm, Manufacturer part number=3296W-1-103LF, Military Standard=Not, Mount="PCB,Through Hole", Number of Turns=25, Packaging=Rail/Tube, Power rating=500mW, Pricing 1="50=2,54800, 100=2,31900, 200=2,14000, 300=1,88400, 500=1,55300 (USD)", Radiation Hardening=No, REACH SVHC="No SVHC", RoHS=Yes, RoHS Compliant=Yes, Series=3296, Stock 1=3300, Supplier 1=RSComponents, Taper=Linear, Technology=CERMET, Termination=Pin, Tolerance=10%, Weight=0.03oz, Width=9.53mm
R7: "Current Sense Resistors - SMD 3watts .002ohms 1%", Case Code (Imperial)=2512, Case Code (Metric)=6432, Manufacturer="Vishay Dale", Manufacturer part number=WSLP25122L000FEA, Max Operating Temperature=170°C, Min Operating Temperature=-65°C, Package Quantity=2000, Power rating=3W, Resistance=2MR, Resistor Type="Metal Strip", Supplier Part Number 1=71-WSLP25122L000FEA, Temperature Coefficient=275ppm/°C, Tolerance=1%, Case/Package=2512, Category="Chip SMD Resistors", ComponentLink1Description=https://datasheet.ciiva.com/48527/wslp-48527354.pdf?src-supplier=Avnet, ComponentLink1URL=https://datasheet.ciiva.com/48527/wslp-48527354.pdf?src-supplier=Avnet, Height=0.635mm, Lead Free="Lead Free", Length=6.4mm, Mount="Surface Mount", Packaging="Tape and Reel", Pricing 1="1=1,07000, 10=1,07000, 50=1,07000, 100=1,07000, 1000=0,77100, 10000=0,75500 (USD)", RoHS=Yes, RoHS Compliant=Yes, Series=WSLP, Size Code=2512, Stock 1=11994, Supplier 1=Mouser, Termination=SMD/SMT, Weight=0.001429oz, Width=3.2mm
R8: library part R51k-1206FTK, "Res Thick Film 1206 51K Ohm 1% 1/4W ±100ppm/°C Molded SMD SMD Punched Carrier T/R", Case Code (Imperial)=1206, Case Code (Metric)=3216, Current Rating=2A, Manufacturer=Panasonic, Manufacturer part number=ERJ-S08F5102V, Max Operating Temperature=155°C, Max power dissipation=250mW, Min Operating Temperature=-55°C, Package Quantity=5000, Resistance=51kR, Resistor Type="Thick Film", Supplier Part Number 1=667-ERJ-S08F5102V, Temperature Coefficient=100ppm/°C, Tolerance=1%, Voltage Rating=150V, Voltage Rating (DC)=200V, .Creator=DO, Case/Package=1206, Category=Resistor, ComponentLink1Description=Datasheet, ComponentLink1URL=https://docs.rs-online.com/bca8/A700000006404581.pdf, ComponentLink2Description="Where buy it", ComponentLink2URL=https://es.rs-online.com/web/p/resistencias-de-montaje-en-superficie/6791765, ComponentLink3Description=https://datasheet.ciiva.com/24023/aoa0000ce5-24023518.pdf?src-supplier=Mouser, ComponentLink3URL=https://datasheet.ciiva.com/24023/aoa0000ce5-24023518.pdf?src-supplier=Mouser, ComponentLink4Description=https://datasheet.ciiva.com/9189/aoa0000ce5-9189211.pdf?src-supplier=Avnet, ComponentLink4URL=https://datasheet.ciiva.com/9189/aoa0000ce5-9189211.pdf?src-supplier=Avnet, Construction=Rectangular, Contact Plating=Tin, Depth=1.6mm, Features=Anti-Sulfur, Height=0.028inch, Lead Free="Lead Free", Length=3.2mm, Military Standard=Not, Mount="Surface Mount", Number of Terminations=2, Packaging="Tape and Reel", Power rating=250mW, Pricing 1="1=0,31000, 10=0,26700, 50=0,26700, 100=0,10700, 1000=0,05100, 10000=0,03400 (USD)", RoHS=Yes, RoHS Compliant=Yes, Series=ERJ, Stock 1=4091, Supplier 1=Mouser, Width=0.063inch
TP1 TP2 TP3 TP4 TP5 TP6 TP7 TP8 TP9 TP10 TP11 TP12 TP13 TP14 TP15: "Test Point 1x1 mm", .Creator=GP, .PCBcheck=GP, .SCHcheck=GP, Category=TestPoint
U1: library part Optocoupler_4N35, "Optocoupler DC-IN 1-CH Transistor With Base DC-OUT 6-Pin PDIP SMD T/R", Case/Package=SMD/SMT, Collector Emitter Saturation Voltage=300mV, Collector Emitter Voltage (VCEO)=70V, Current Transfer Ratio=320%, Forward Current=60mA, Forward Voltage=1.65V, Isolation Voltage=5kV, Manufacturer="Vishay Lite-On", Manufacturer part number=CNY17-4S-TA1, Max Collector Current=150mA, Max Operating Temperature=100°C, Max power dissipation=250mW, Min Operating Temperature=-55°C, Package Quantity=1000, Reverse Breakdown Voltage=6V, Supplier Part Number 1=1278380P, .Creator=DO, Category=Optocouplers, Collector-emitter Voltage-Max=300mV, ComponentLink1Description=https://datasheet.ciiva.com/15118/getdatasheetpartid-187668-15118874.pdf?src-supplier=Verical, ComponentLink1URL=https://datasheet.ciiva.com/15118/getdatasheetpartid-187668-15118874.pdf?src-supplier=Verical, ComponentLink2Description=https://datasheet.ciiva.com/6573/s-110-cny17-6573733.pdf?src-supplier=Digi-Key, ComponentLink2URL=https://datasheet.ciiva.com/6573/s-110-cny17-6573733.pdf?src-supplier=Digi-Key, ComponentLink3Description="Where buy it", ComponentLink3URL=https://es.rs-online.com/web/p/circuitos-integrados-optoacopladores/1257571, Fall Time=10000ns, Input Type=DC, Lead Free="Lead Free", Max Input Current=60mA, Max Output Voltage=70V, Mount="Surface Mount", Number of Channels=1, Number of Circuits=1, Number of Elements=1, Number of Pins=6, Output Current per Channel=150mA, Output Voltage=70V, Packaging="Tape and Reel", Power Dissipation=250mW, Pricing 1="50=0,27200, 250=0,25600, 500=0,24000, 1250=0,22500, 2500=0,21200 (USD)", Radiation Hardening=No, Rise Time=10000ns, RoHS=Yes, RoHS Compliant=Yes, Series=-, Stock 1=1, Supplier 1=RSComponents
U2: library part Array_4_Amp_LM339D, "Comparator Quad ±18V/36V 14-Pin SOIC Tube", Case/Package=SOIC, Dual Supply Voltage=9V, Input Bias Current=250nA, Input Offset Voltage (Vos)=5mV, Manufacturer="Texas Instruments", Max Dual Supply Voltage=15V, Max Operating Temperature=70°C, Max Supply Current=500uA, Max Supply Voltage=30V, Min Dual Supply Voltage=1V, Min Operating Temperature=0°C, Min Supply Voltage=2V, Nominal Supply Current=2mA, Output Current=20mA, Output Current per Channel=6mA, Package Quantity=50, Quiescent Current=2.5mA, Supplier Part Number 1=296-1013-5-ND, Voltage Gain=106.02dB, .Creator=DO, Category="Amplifiers - Op Amps, Buffer, Instrumentation", ComponentLink1Description=https://datasheet.ciiva.com/15131/getdatasheetpartid-248452-15131099.pdf?src-supplier=Verical, ComponentLink1URL=https://datasheet.ciiva.com/15131/getdatasheetpartid-248452-15131099.pdf?src-supplier=Verical, ComponentLink2Description=https://datasheet.ciiva.com/1483/1831045-1483000.pdf?src-supplier=Element14, ComponentLink2URL=https://datasheet.ciiva.com/1483/1831045-1483000.pdf?src-supplier=Element14, ComponentLink3Description=https://datasheet.ciiva.com/1827/lm139a-1827534.pdf?src-supplier=Digi-Key, ComponentLink3URL=https://datasheet.ciiva.com/1827/lm139a-1827534.pdf?src-supplier=Digi-Key, ComponentLink4Description=https://datasheet.ciiva.com/2970/lm2901-2970484.pdf?src-supplier=Avnet, ComponentLink4URL=https://datasheet.ciiva.com/2970/lm2901-2970484.pdf?src-supplier=Avnet, ComponentLink5Description=https://datasheet.ciiva.com/48712/001010753-da-01-en-ic-quad-diff-comp-lm339d-soic-14-tid-48712470.pdf?src-supplier=Conrad, ComponentLink5URL=https://datasheet.ciiva.com/48712/001010753-da-01-en-ic-quad-diff-comp-lm339d-soic-14-tid-48712470.pdf?src-supplier=Conrad, ComponentLink6Description="Where buy it", ComponentLink6URL=https://es.rs-online.com/web/p/comparadores/0858411, Contact Plating=Gold, Height=1.58mm, Lead Free="Lead Free", Length=8.65mm, Manufacturer part number=LM339D, Max Input Current=250nA, Mount="Surface Mount", Number of Channels=4, Number of Elements=4, Number of Pins=14, Output Type=TTL, Packaging=Rail/Tube, Pricing 1="1=0,93000, 10=0,83500, 25=0,79240, 100=0,65090, 250=0,60848, 500=0,53774, 1000=0,46725 (USD)", Radiation Hardening=No, REACH SVHC="No SVHC", Response Time=0.3us, RoHS=Yes, RoHS Compliant=Yes, Series=LM339, Stock 1=10834, Supplier 1=Digi-Key, Supply Current=2mA, Technology=BIPOLAR, Weight=0.004318oz, Width=3.91mm
X_discharge: library part Relay_DBR72410FU, "Relay, Reed Switch, SPNC, Rhodium Cntcts, 24VDC, 10kV Isol., PCB Mnt/Coil Conn./FL HV", Coil Current=25.9mA, Coil Resistance=925R, Coil Voltage (DC)=24V, Contact Current Rating=3A, Contact Resistance=50mR, Manufacturer=Cynergy3, Manufacturer part number=DBR72410F, Max Operating Temperature=70°C, Min Operating Temperature=-20°C, Package Quantity=20, Supplier Part Number 1=89C4343, Category="Power Relays", Coil Type=Non-Latching, ComponentLink1Description=https://datasheet.ciiva.com/15041/dseries-15041454.pdf?src-supplier=Digi-Key, ComponentLink1URL=https://datasheet.ciiva.com/15041/dseries-15041454.pdf?src-supplier=Digi-Key, Contact Material=Rhodium, Current Rating=3A, Depth=15.8mm, Height=18.5mm, Length=60mm, Life (Hours)=100000Hour, Mount="Through Hole,PCB", Number of Pins=4, Number of Poles=1, Operate Time=2ms, Packaging=Tray, Relay Type=Reed, Release Time=3ms, RoHS=Yes, RoHS Compliant=Yes, Series=D, Supplier 1=Newark, Termination="Wire Leads", Throw Configuration=SPST, Voltage Rating (DC)=24V

## Via types
v1: diameter 0.7, hole 0.3, Top Layer to Bottom Layer, tented both sides, 14 vias
v2: diameter 1.5, hole 1.5, Top Layer to Bottom Layer, 4 vias
v3: diameter 0.7, hole 0.3, Top Layer to Bottom Layer, tented bottom, 3 vias
v4: diameter 3.2, hole 3.2, Top Layer to Bottom Layer, 3 vias
v5: diameter 1.5, hole 0.7, Top Layer to Bottom Layer, tented both sides, 1 vias

## Nets (pads, with @x,y where several pads share a name; then routed paths per layer and width w, separated by ;. In a path a pad name is that pad's centre, name@x,y a point inside that pad or via, vN(x,y) a via of type N, cw(c..) or ccw(c..) an arc to the next point about the centre after c; other vN are vias at no path point)
"+5 TS": C1.1 C2.1 C3.1 DCDC2.4 R2.2 R5.1 R6.2 TP1.1 TP8.1 U2.3 | length 64.4
  Top Layer w0.5: R2.2 3.925,6.925 cw(c4.5,6.925) 4.5,7.5 ccw(c4.5,8) 5,8 5,9.5 cw(c7,9.5) 7,11.5 7.08,11.5 ; R5.1 4.54,14.04 ccw(c7.08,14.04) 7.08,11.5 ; R6.2 10.212,15.613 10.234,15.545 ccw(c10.434,16.004) 10.294,15.523 cw(c9.925,14.23) 11.27,14.23 U2.3 cw(c9.045,13.725) 9.491,11.545 ; DCDC2.4 31.46,15.54 cw(c31.46,19) 28,19 ccw(c24.55,19) 24.55,22.45 C1.1 C2.1 C3.1 ccw(c19,20.05) 16.6,20.05 16.6,13.572 cw(c14.573,13.572) 14.573,11.545 9.491,11.545 ; 7.08,11.5 9.045,11.5 ccw(c9.045,13.725) 9.491,11.545
  Bottom Layer w0.5: TP1.1 4.5,15.42 cw(c4.54,15.42) R5.1 cw(c4.58,15.46) 4.58,15.5 TP8.1
+12: C4.1 C5.1 C6.1 DCDC1.3 DCDC2.3 R1.2 R3.2 R4.2 TP4.1 | length 36.2